# Altium PCB PCB1.PcbDoc
Units mm, origin at the board's own origin, x right, y up, seen from the top; angles counter-clockwise.
Board outline 100 x 100 mm, 4 copper layers (Top Layer, Internal Plane 1, Internal Plane 2, Bottom Layer), stack 0.462 mm thick; 27 components, 17 nets, 92 pads, 2 vias.
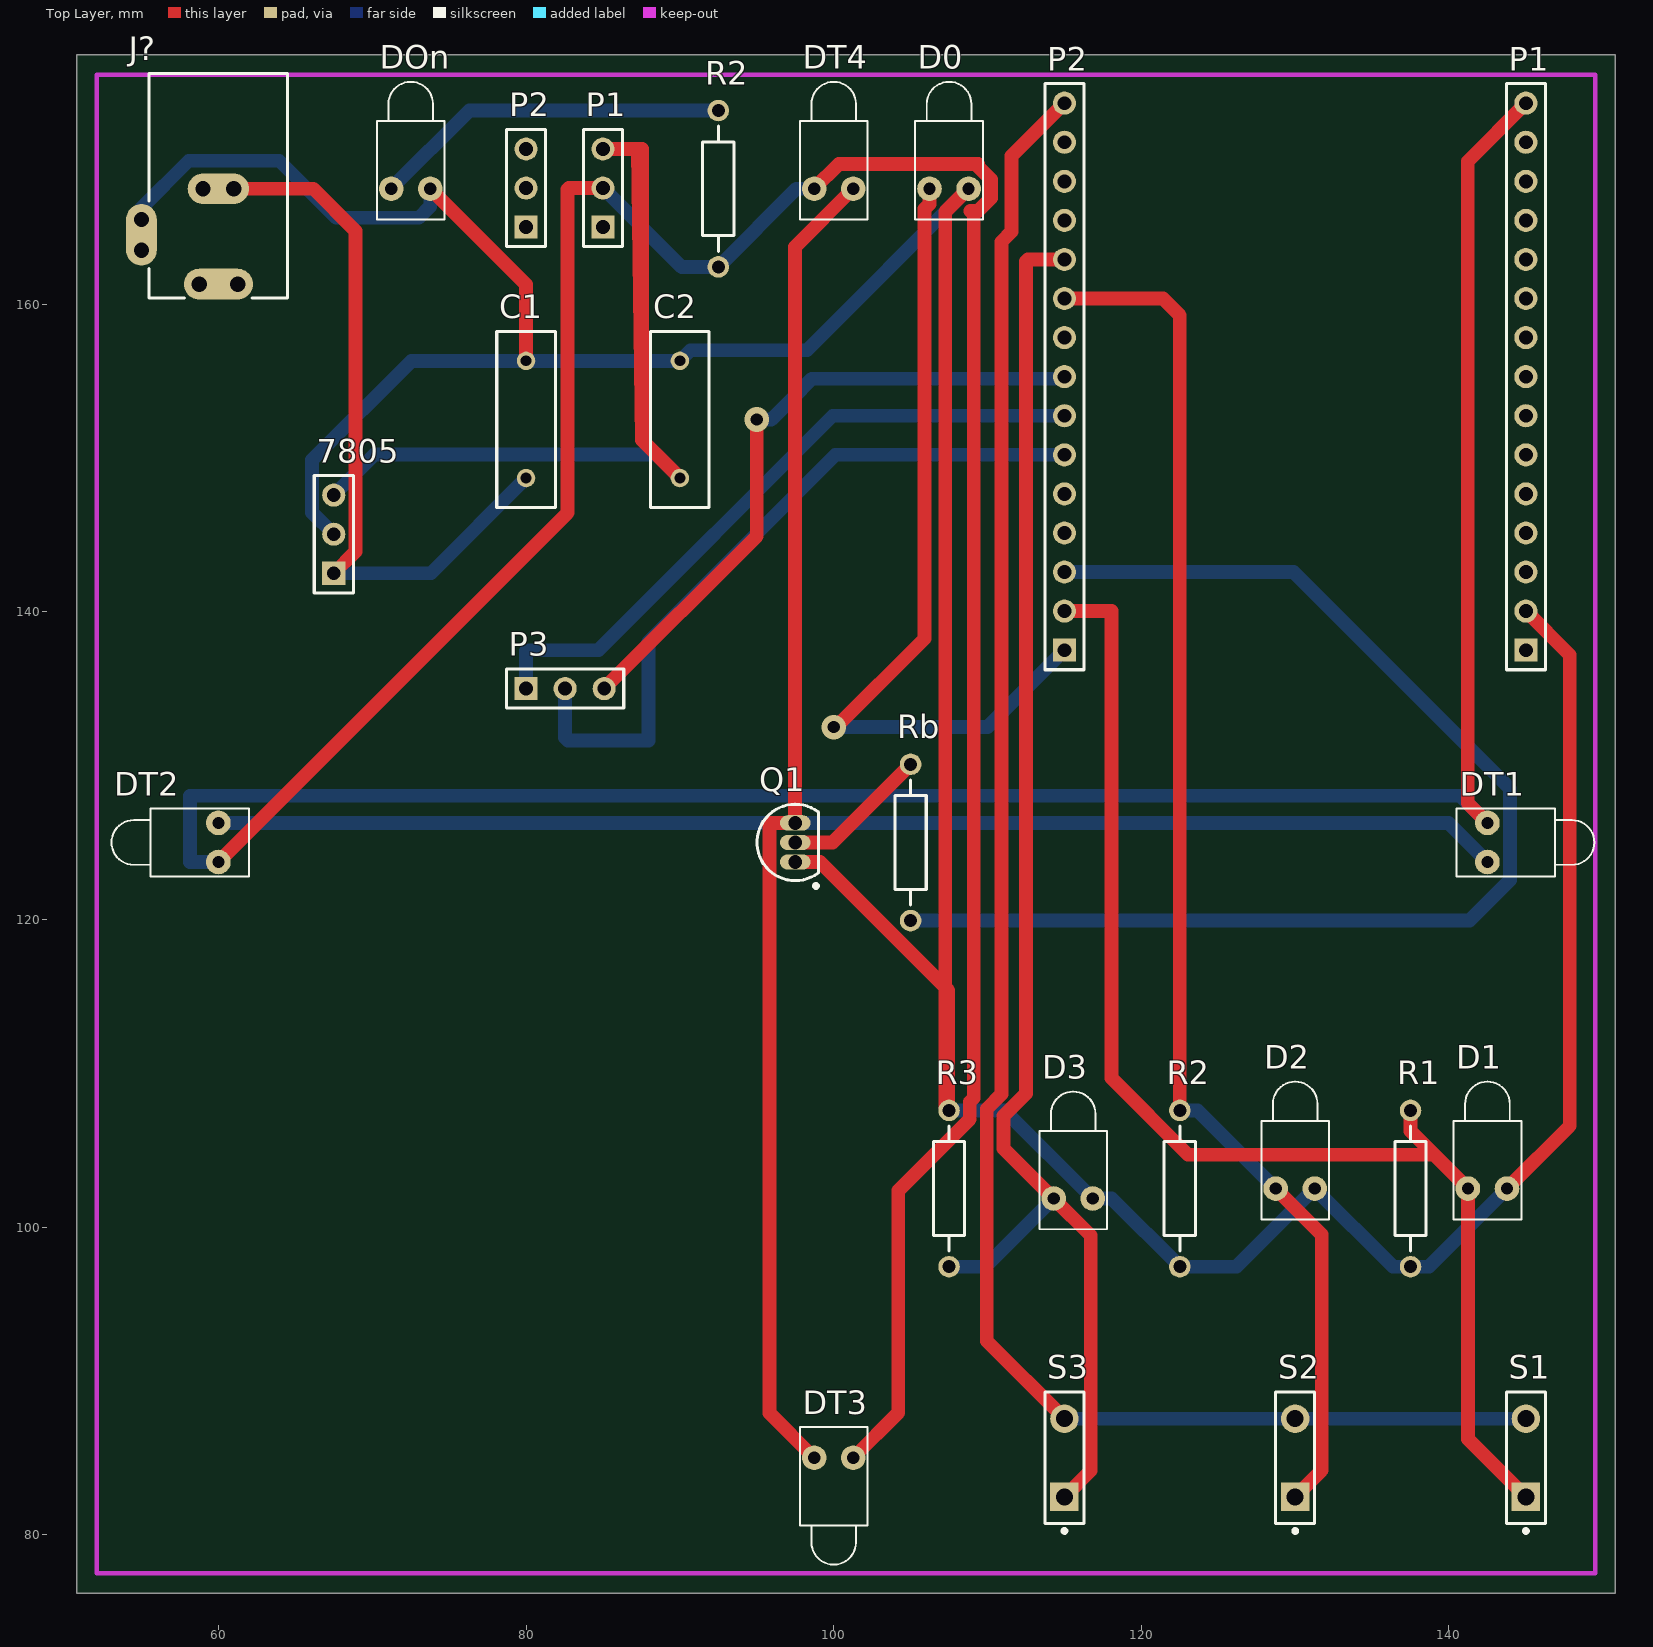
[diagram p0: Top Layer view]
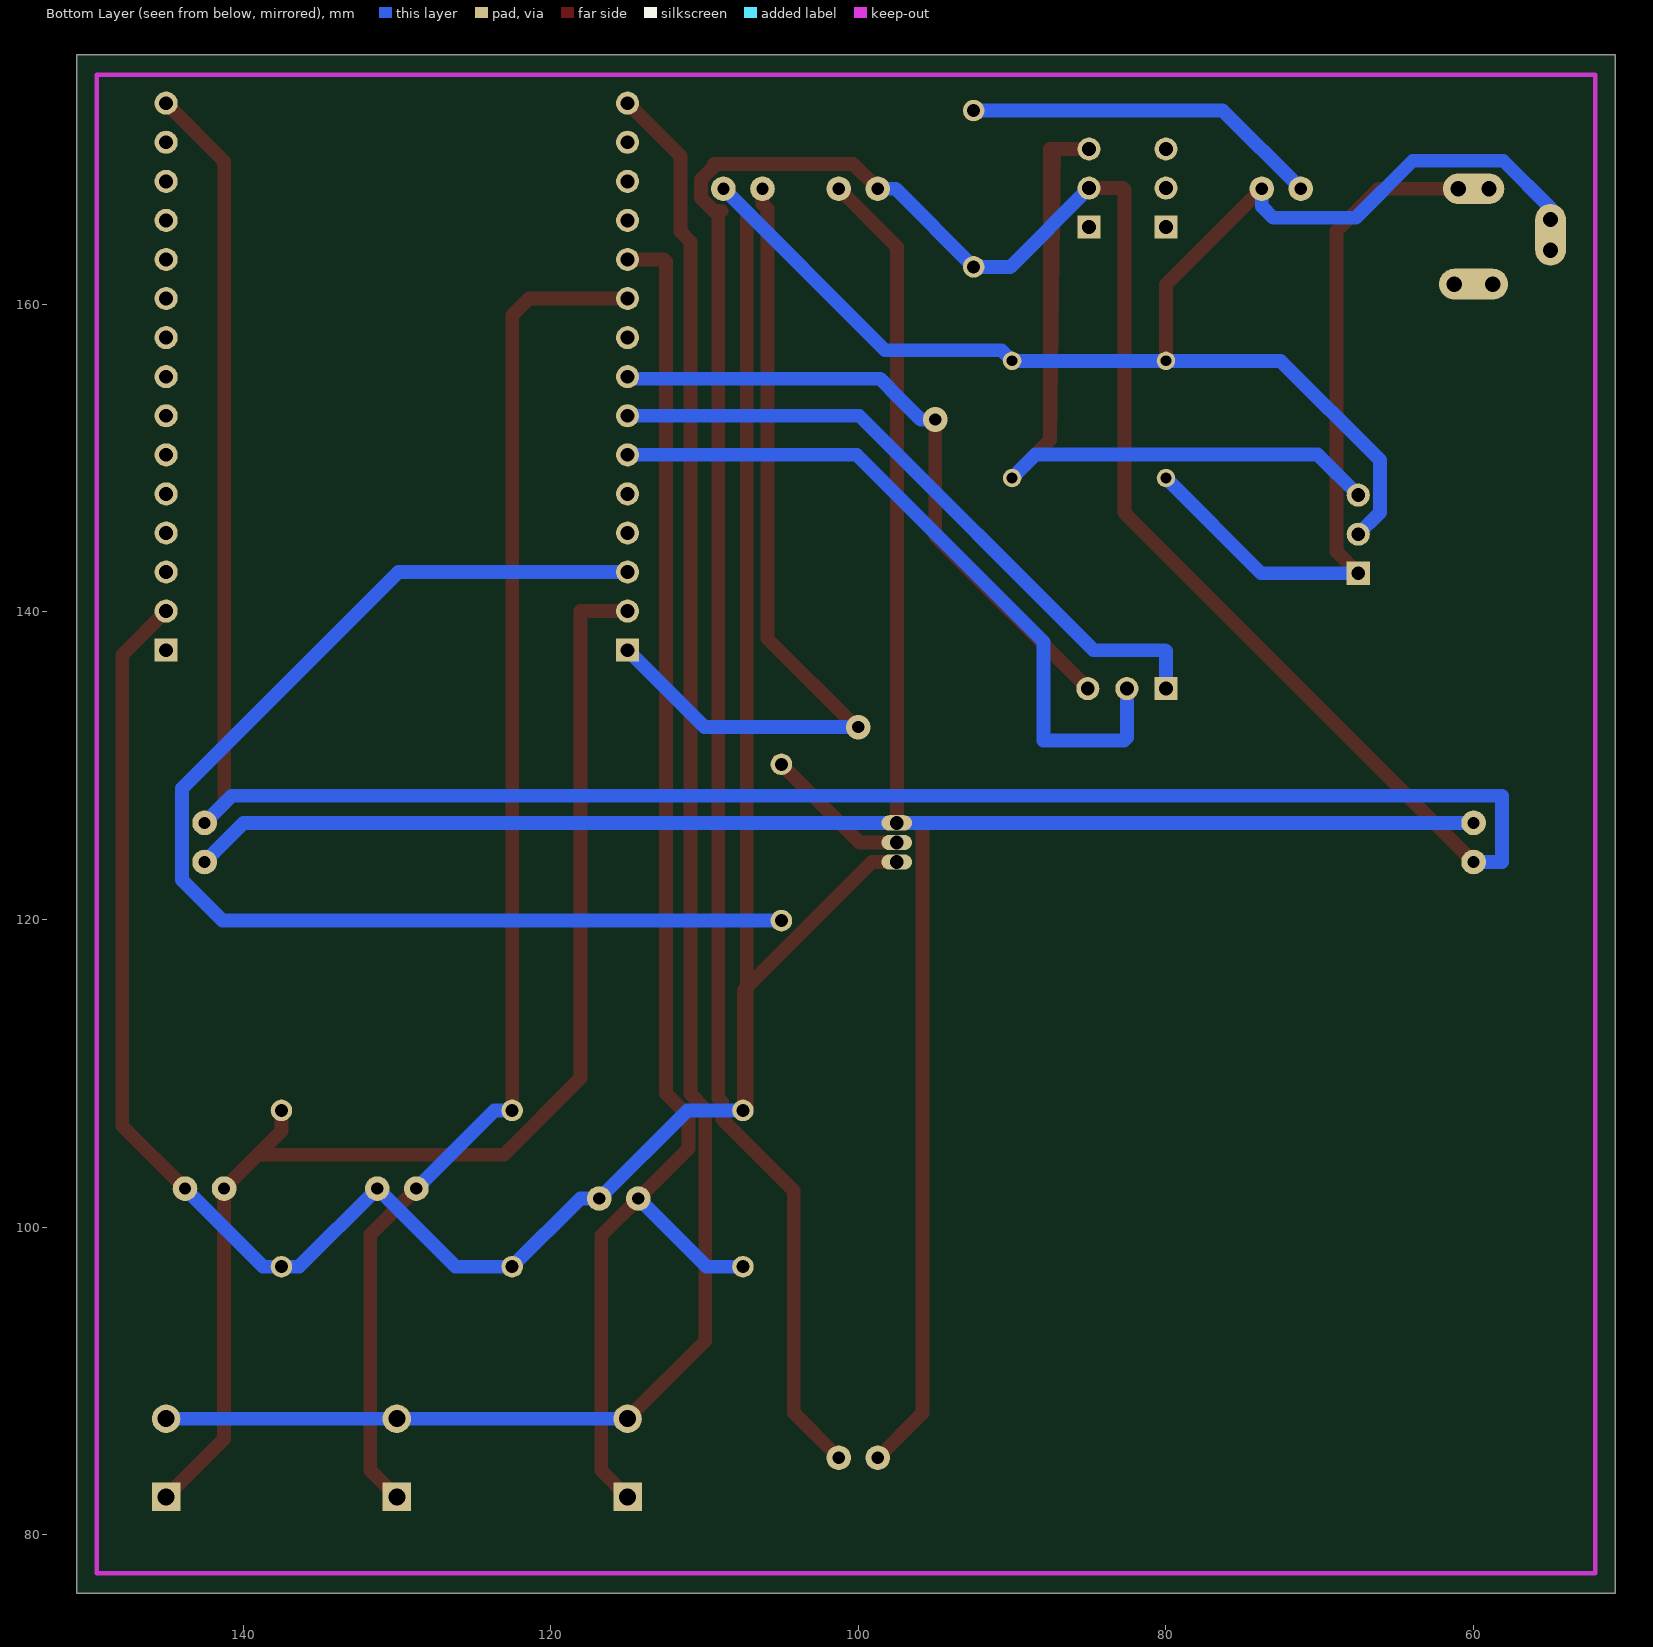
[diagram p1: Bottom Layer view, seen from below]
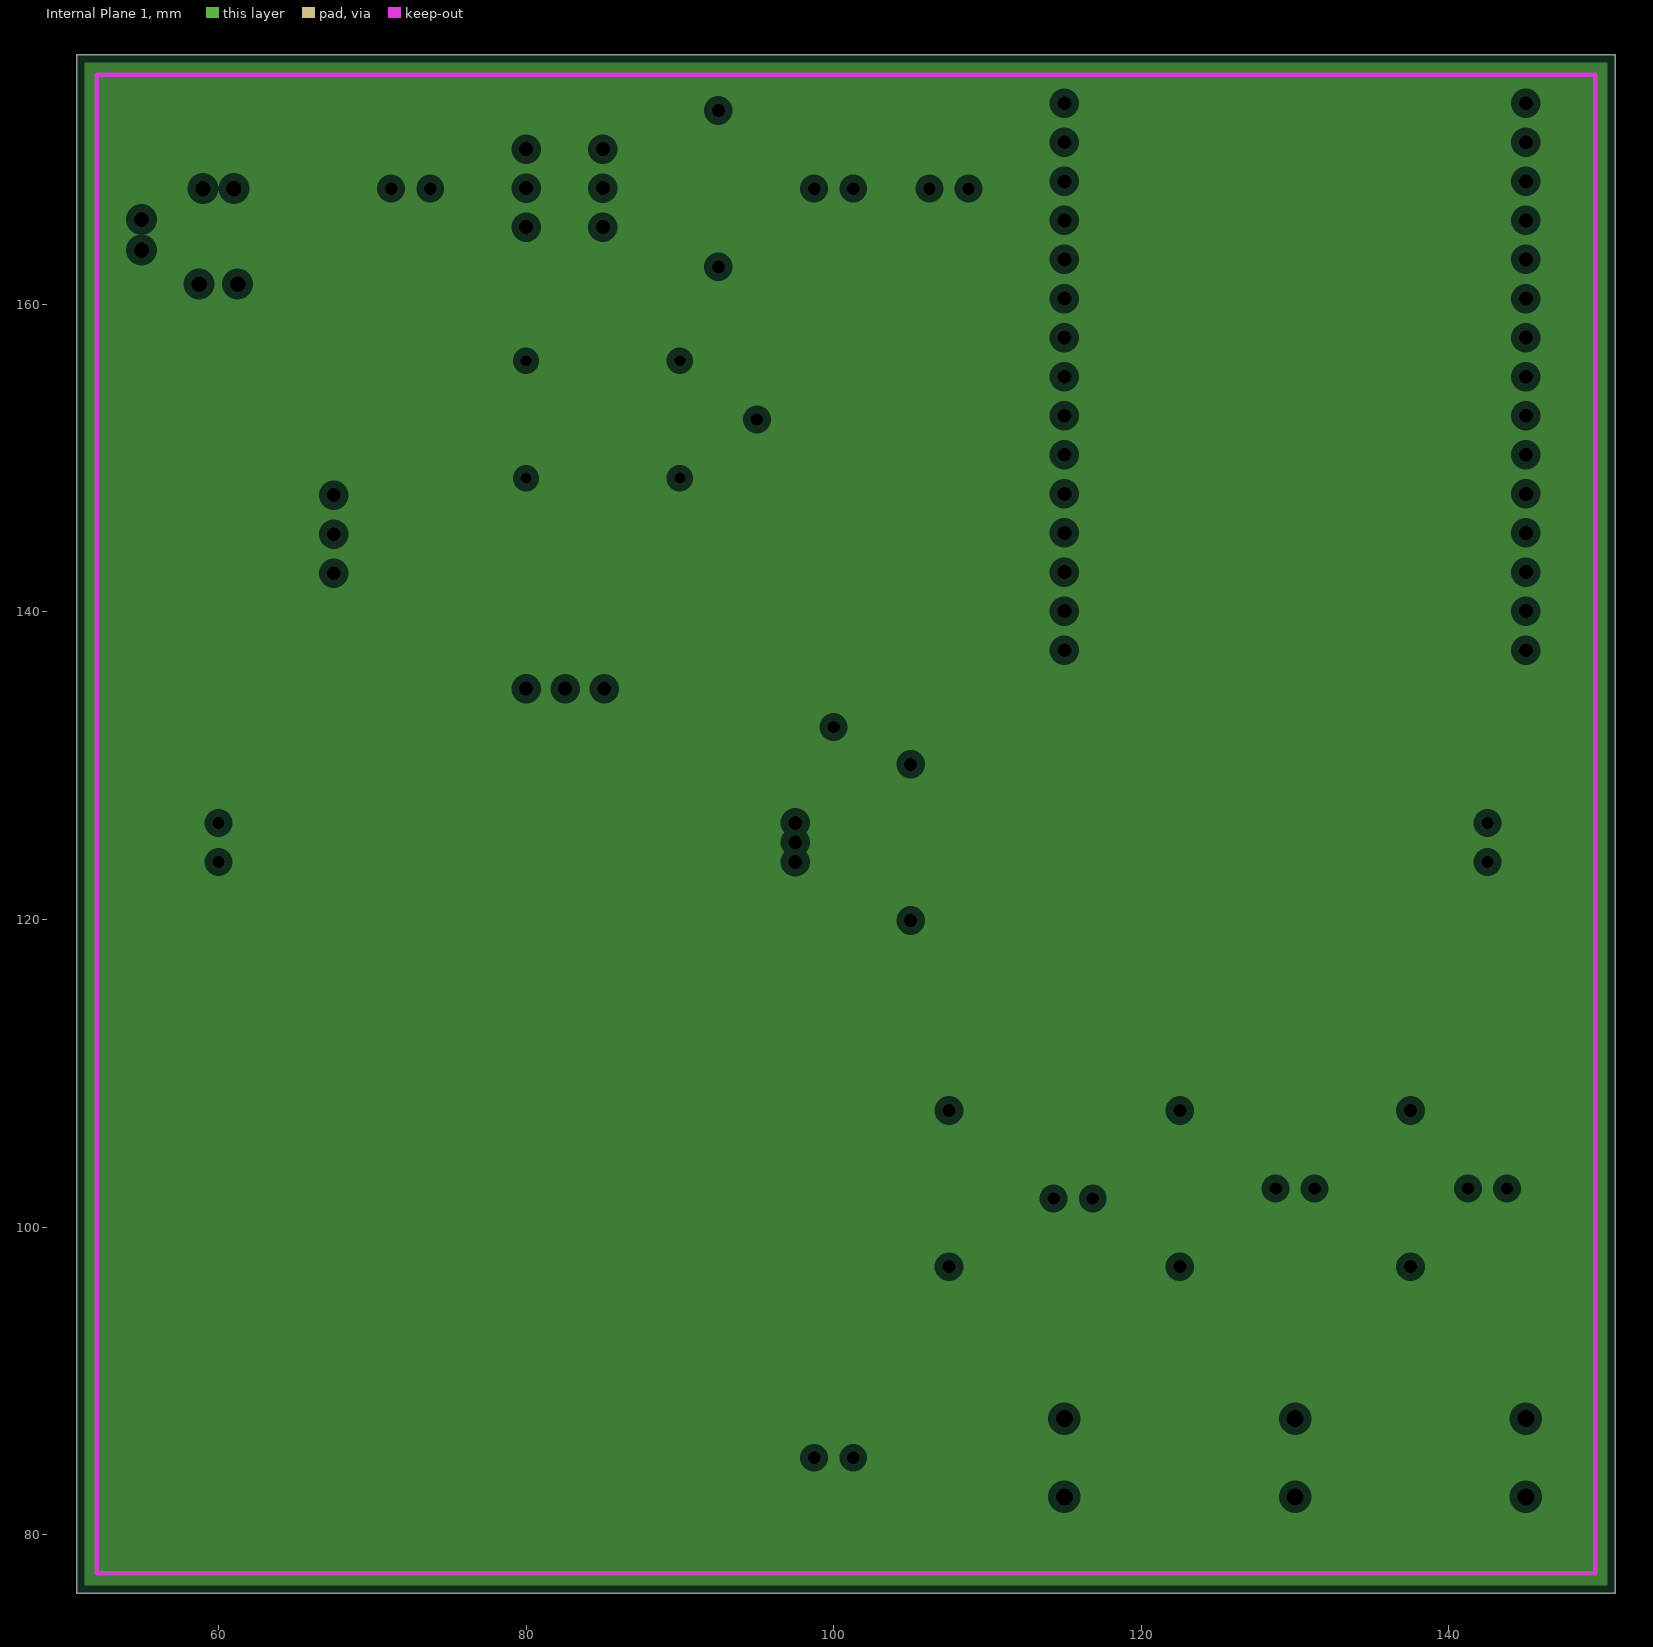
[diagram p2: Internal Plane 1, clearances drawn from the general rule]
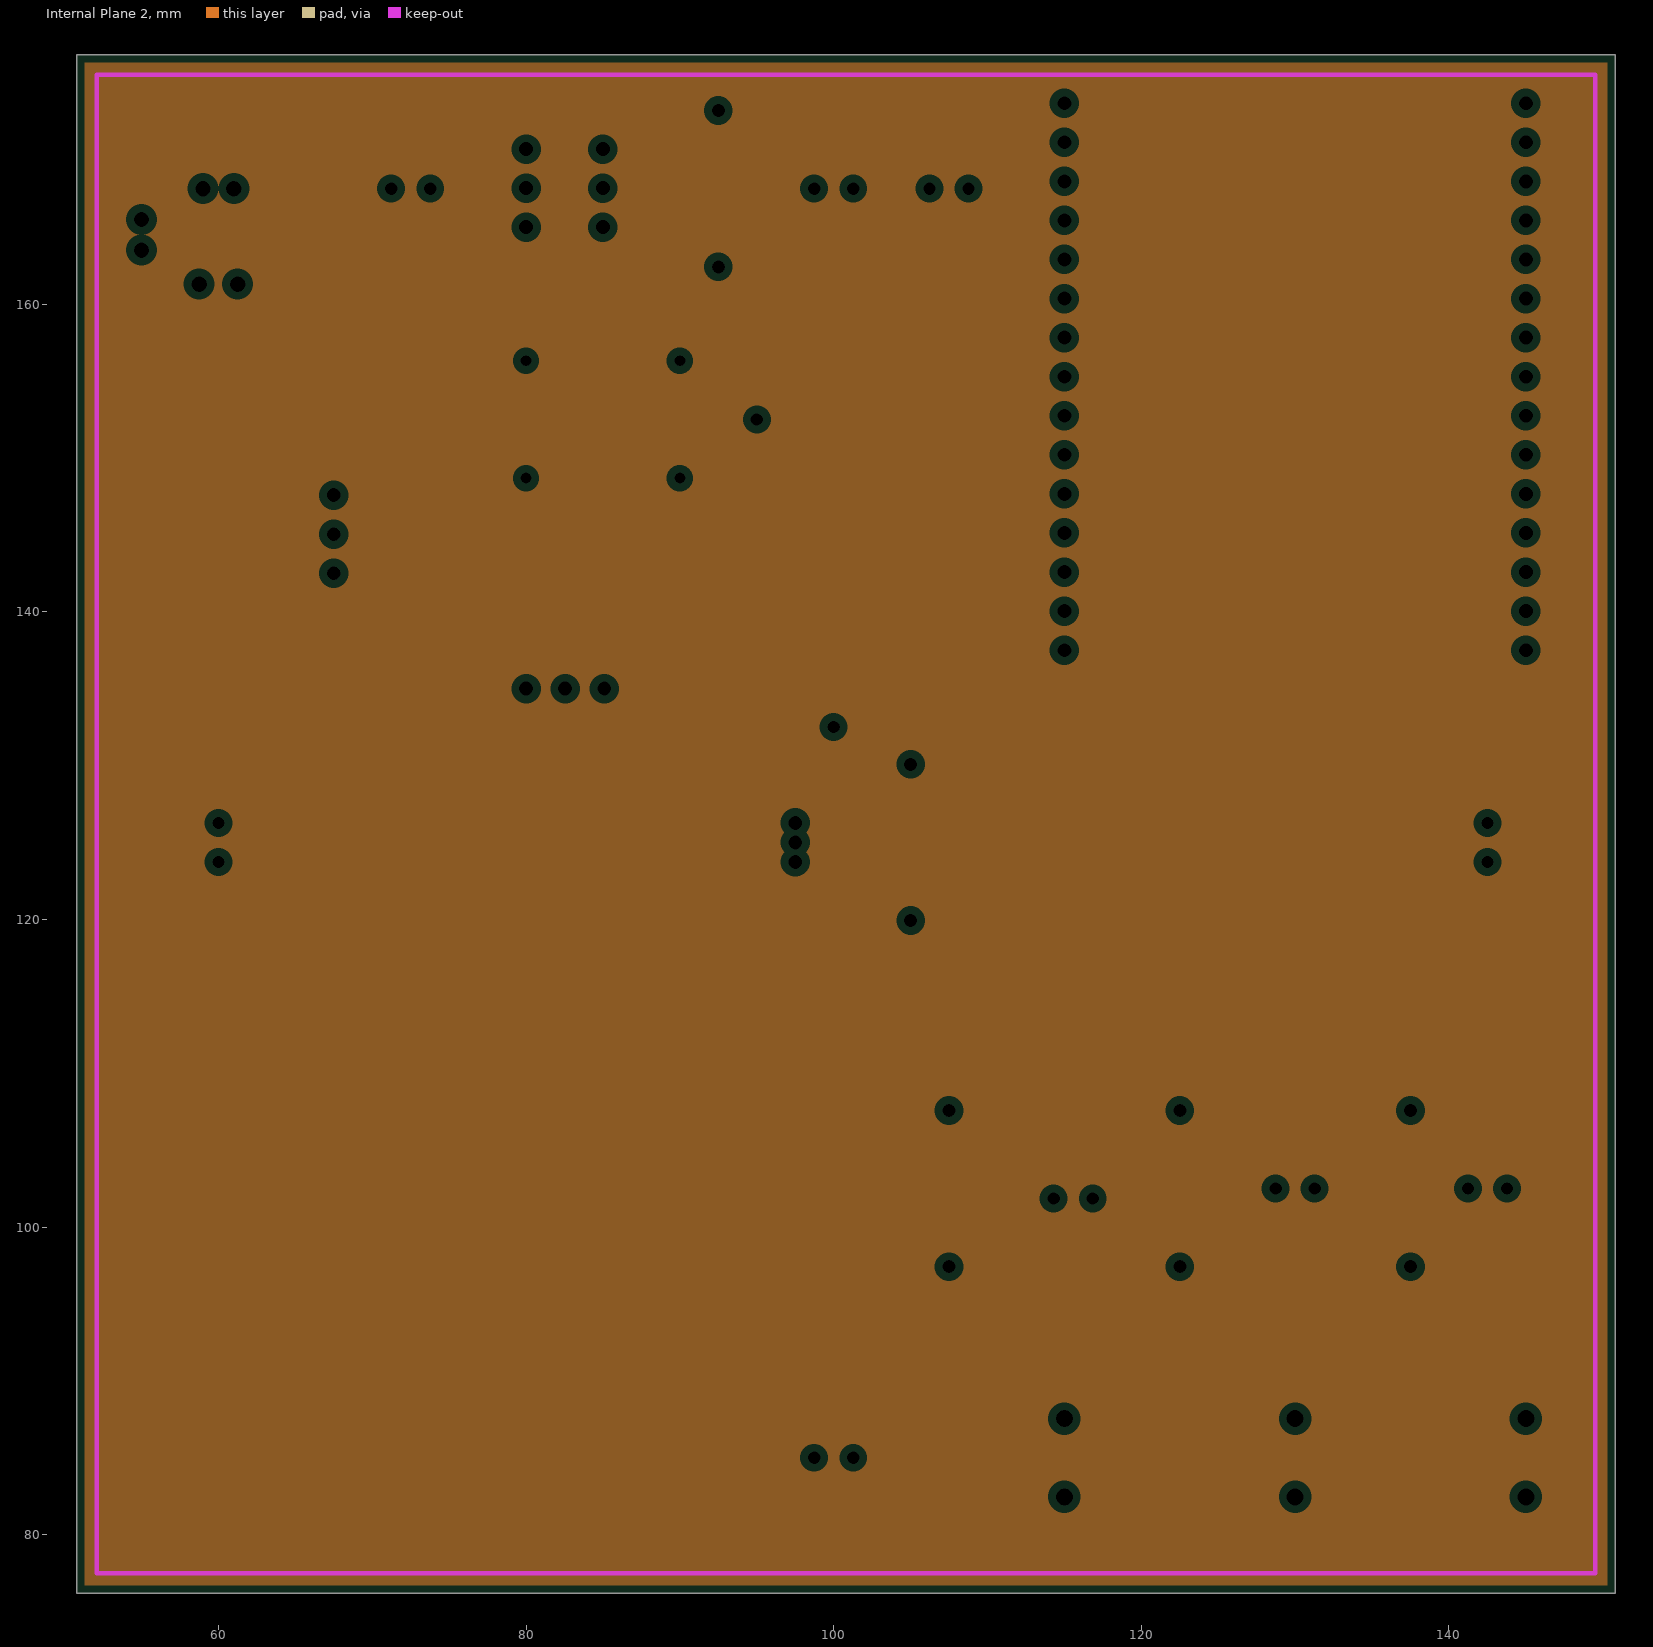
[diagram p3: Internal Plane 2, clearances drawn from the general rule]

## Layer stack, top to bottom
Top Solder: solder mask 0.0102, Solder Resist, Dk 3.5
Top Layer: signal copper 0.0356
Internal Plane 1: plane copper 0.0356
Internal Plane 2: plane copper 0.0356
Dielectric 1: dielectric 0.32, FR-4, Dk 4.8
Bottom Layer: signal copper 0.0356
Bottom Solder: solder mask 0.0102, Solder Resist, Dk 3.5

## Board outline
50.8,76.2 150.8,76.2 150.8,176.2 50.8,176.2

## Design rules (kind name [scope] priority, off if disabled: settings)
Clearance [All] p1: gap=0.2
PlaneClearance [All] p1: clearance=0.508
PlaneConnect [All] p1: planeconnectstyle=Relief reliefexpansion=0.508 reliefentries=4 reliefconductorwidth=0.254 reliefairgap=0.254
PolygonConnect [All] p1: connectstyle=Relief reliefconductorwidth=0.254 reliefentries=4 polygonreliefangle="90 Angle" airgapwidth=0.254
RoomDefinition Sheet1 [InComponentClass('Sheet1')] p1: confinementstyle=ConfineIn formatcopy=TRUE lockcomponents=FALSE outline 162.5,62.5 20,62.5 20,181.102 162.5,181.102
RoutingVias [All] p1: holewidth=0.8 width=1.6 viastyle="Through Hole" minholewidth=0.711 minwidth=1.27 maxholewidth=0.711 maxwidth=1.27
SolderMaskExpansion [All] p1: expansion=0.102
Width [All] p1: maxlimit=1 minlimit=0.8 preferedwidth=0.9
28 further rules are at their usual default settings.

## Classes and differential pairs
component class Sheet1: 7805 C1 C2 D0 D1 D2 D3 DOn DT1 DT2 DT3 DT4 J? P1 P2 P3 Q1 R1 R2 R3 Rb S1 S2 S3

## Components (designator, comment, footprint, x,y, rotation, side; value= is the part's Value field where it differs from the comment)
7805 "7805" HDR1X3 67.5,142.5 r90 top
C1 "Cap" RAD-0.3 80,152.5 r90 top
C2 "Cap" RAD-0.3 90,152.5 r90 top
D0 "LED1" LED-1 107.5,167.5 r90 top
D1 "LED1" LED-1 142.5,102.5 r90 top
D2 "LED1" LED-1 130,102.5 r90 top
D3 "LED1" LED-1 115.57,101.854 r90 top
DOn "LED1" LED-1 72.5,167.5 r90 top
DT1 "LED1" LED-1 142.5,125 r0 top
DT2 "LED1" LED-1 60,125 r180 top
DT3 "LED1" LED-1 100,85 r270 top
DT4 "LED1" LED-1 100,167.5 r90 top
J? "PWR2.5" KLD-0202 60,175 r270 top
P1 "Header 15" HDR1X15 145,137.5 r90 top
P1 "uf" HDR1X3 85,165 r90 top
P2 "Header 15" HDR1X15 115,137.5 r90 top
P2 "ul" HDR1X3 80,165 r90 top
P3 "IrRECV" HDR1X3 80,135 r0 top
Q1 "2N3904" TO-92A 97.5,125 r0 top
R1 "Res2" AXIAL-0.4 137.5,102.5 r90 top
R2 "Res2" AXIAL-0.4 122.5,102.5 r90 top
R2 "Res2" AXIAL-0.4 92.5,167.5 r90 top
R3 "Res2" AXIAL-0.4 107.5,102.5 r90 top
Rb "Res2" AXIAL-0.4 105,125 r90 top
S1 "SW-PB" SPST-2 145,85 r90 top
S2 "SW-PB" SPST-2 130,85 r90 top
S3 "SW-PB" SPST-2 115,85 r90 top

## Footprints (in the part's own frame and the unit in brackets; to place one, negate y for a bottom-side part, rotate by r counter-clockwise, add the part's x,y. Pads: shape width x height; smd on the part's side, far side on the other; paste and mask are expansions set on the pad)
AXIAL-0.4 [mm] "Axial Device, Thru-Hole; 2 Leads; 0.4 in Pin Spacing"
  round 1.4 hole 0.85: 1(-5.08,0) 2(5.08,0)
  silkscreen extent -4.06,-1.02 4.06,1.02
HDR1X3 [mm] "Connector; Header; 3 Position"
  rect 1.5x1.5 hole 0.9: 1(0,0)
  round 1.5 hole 0.9: 2(2.54,0) 3(5.08,0)
  silkscreen extent -1.27,-1.27 6.35,1.27
HDR1X15 [mm] "Connector; Header; 15 Position"
  rect 1.5x1.5 hole 0.9: 1(0,0)
  round 1.5 hole 0.9: 2(2.54,0) 3(5.08,0) 4(7.62,0) 5(10.16,0) 6(12.7,0) 7(15.24,0) 8(17.78,0) 9(20.32,0) 10(22.86,0) 11(25.4,0) 12(27.94,0) 13(30.48,0) 14(33.02,0) 15(35.56,0)
  silkscreen extent -1.27,-1.27 36.83,1.27
KLD-0202 [mm] "DC Power Jack, 2.5mm, KLD Series, PCB Mount"
  oval 2x4.5 all layers, no hole: 1(13.7,0)
  round 1.5 hole 1: 1A(13.7,-1.25) 1B(13.7,1.25) 2A(7.5,-1) 2B(7.5,1) 3A(9.5,-5) 3B(11.5,-5)
  oval 2x4 all layers, no hole: 2(7.5,0)
  oval 4x2 all layers, no hole: 3(10.5,-5)
  silkscreen extent 0,-4.5 14.6,4.5
LED-1 [mm] "LED; 2 Leads"
  round 1.6 hole 0.8: 1(0,1.27) 2(0,-1.27)
  silkscreen extent -2,-2.2 6.95,2.2
RAD-0.3 [mm] "Radial Cap, Thru-Hole; 2 Leads; 0.3 in Pin Spacing"
  round 1.2 hole 0.7: 1(-3.81,0) 2(3.81,0)
  silkscreen extent -5.72,-1.91 5.71,1.9
SPST-2 [mm] "Switch; 2 Leads"
  rect 1.85x1.85 hole 1.1: 1(-2.54,0)
  round 1.85 hole 1.1: 2(2.54,0)
  silkscreen extent -4.89,-1.27 4.28,1.27
TO-92A [mm] "TO, Flat Index; 3 In-Line, Axial Leads; Body Dia. 4.5mm; Leads 0.51 x 0.48 mm (max)"
  oval 2x1 hole 0.9: 1(0,-1.27) 2(0,0) 3(0,1.27)
  silkscreen extent -2.48,-2.95 1.5,2.48, body extent -2.5,-2.5 1.5,2.5, height 6.86

## Part data
7805 P1 P2 P3: library part "Header 3", "Header, 3-Pin"
C1 C2: "Capacitor"
D0 D1 D2 D3 DOn DT1 DT2 DT3 DT4: "Typical RED GaAs LED"
J?: "Low Voltage Power Supply Connector"
P1 P2: "Header, 15-Pin"
Q1: "NPN General Purpose Amplifier"
R1 R2 R2 R3 Rb: "Resistor"
S1 S2 S3: "Switch"

## Via types
v1: diameter 1.6, hole 0.8, Top Layer to Bottom Layer, 2 vias

## Nets (pads, with @x,y where several pads share a name; then routed paths per layer and width w, separated by ;. In a path a pad name is that pad's centre, name@x,y a point inside that pad or via, vN(x,y) a via of type N, cw(c..) or ccw(c..) an arc to the next point about the centre after c; other vN are vias at no path point)
GND: 7805.2 C1.2 C2.2 D0.2 D1.2 D2.2 D3.2 DOn.2 J?.3 J?.3A J?.3B P1.2@145,140.04 Q1.1 R1.1 R2.1@122.5,97.42 R3.2 | length 265
  Top Layer w0.9: J?.3B J?.3 J?.3A ; DOn.2 80,161.27 C1.2 ; Q1.1 99.104,123.73 107.45,115.384 R3.2@107.45,107.63 ; R3.2 107.25,107.83 107.25,165.98 D0.2 ; D1.2 147.85,106.58 147.85,137.19 P1.2@145,140.04
  Bottom Layer w0.9: J?.3 J?.3A 55,166.243 58.073,169.316 63.957,169.316 67.666,165.608 73.025,165.608 73.77,166.353 DOn.2 ; 7805.2 66.091,146.449 66.091,149.86 72.541,156.31 C1.2 84.988,156.31 C2.2 90.687,156.997 98.267,156.997 D0.2 ; R3.2 111.114,107.58 D3.2 118.066,101.854 122.5,97.42 126.19,97.42 D2.2 136.35,97.42 R1.1 138.69,97.42 D1.2
Net7805_1: 7805.1 C1.1 J?.2 J?.2A J?.2B | length 50
  Top Layer w0.9: J?.2 J?.2B 66.167,167.5 68.91,164.757 68.91,143.91 7805.1
  Bottom Layer w0.9: J?.2A J?.2 J?.2B ; 7805.1 73.81,142.5 C1.1
Net7805_3: 7805.3 C2.1 P1.3@85,170.08 | length 68.1
  Top Layer w0.9: P1.3@85,170.08 87.262,170.08 ; C2.1 87.528,151.162 ; 87.262,170.08 87.528,170.08 87.528,151.162 ; 87.262,170.08 87.528,151.162
  Bottom Layer w0.9: 7805.3 70.136,150.216 88.474,150.216 C2.1
NetD0_1: D0.1 P2.1@115,137.5 | length 54.7
  Top Layer w0.9: v1(100,132.5) 100.155,132.5 105.9,138.245 105.9,166.186 106.23,166.516 D0.1
  Bottom Layer w0.9: v1(100,132.5) 110,132.5 P2.1@115,137.5
NetD1_1: D1.1 P2.2@115,140.04 R1.2 S1.1 | length 84.7
  Top Layer w0.9: P2.2@115,140.04 118.059,140.04 118.059,109.677 123.036,104.7 139.03,104.7 ; R1.2 137.5,106.23 D1.1 141.23,86.23 S1.1
NetD2_1: D2.1 P2.10 R2.2@122.5,107.58 S2.1 | length 90
  Top Layer w0.9: P2.10 121.4,160.36 122.5,159.26 R2.2@122.5,107.58 ; D2.1 131.724,99.506 131.724,84.184 S2.1
  Bottom Layer w0.9: R2.2@122.5,107.58 123.65,107.58 D2.1
NetD3_1: D3.1 P2.11 R3.1 S3.1 | length 95.2
  Top Layer w0.9: S3.1 116.713,84.173 116.713,99.441 D3.1 111.05,105.104 111.05,107.228 112.5,108.678 112.5,162.775 112.625,162.9 P2.11
  Bottom Layer w0.9: R3.1 109.866,97.42 D3.1
NetDOn_1: DOn.1 R2.2@92.5,172.58 | length 23.4
  Bottom Layer w0.9: DOn.1 76.31,172.58 R2.2@92.5,172.58
NetDT1_1: DT1.1 DT2.1 DT3.1 DT4.1 P1.2@85,167.54 P1.15 R2.1@92.5,162.42 | length 313.5
  Top Layer w0.9: DT2.1 82.7,146.43 82.7,167.45 82.79,167.54 P1.2@85,167.54 ; DT4.1 100.343,169.113 109.398,169.113 109.371,169.086 109.371,168.95 110.22,168.101 110.22,166.899 109.371,166.05 108.876,166.05 109.1,165.826 109.1,108.389 108.85,108.139 108.85,107.021 104.2,102.371 104.2,87.93 DT3.1 ; DT1.1 141.225,127.545 141.225,169.285 P1.15
  Bottom Layer w0.9: DT2.1 58.15,123.73 58.15,128.041 140.729,128.041 DT1.1 ; P1.2@85,167.54 90.12,162.42 92.5,162.42 97.58,167.5 DT4.1
NetDT1_2: DT1.2 DT2.2 DT3.2 DT4.2 Q1.3 | length 170.5
  Top Layer w0.9: Q1.3 Q1.3@97.485,126.27 ; DT3.2 95.834,87.896 95.834,126.27 Q1.3@97.485,126.27 ; DT4.2 97.485,163.715 Q1.3@97.485,126.27
  Bottom Layer w0.9: DT2.2 Q1.3 139.96,126.27 DT1.2
NetJ?_1: J?.1 J?.1A J?.1B | length 2.5
  Bottom Layer w0.9: J?.1A J?.1 J?.1B
NetP2_3: P2.3@115,142.58 Rb.1 | length 80.8
  Bottom Layer w0.9: Rb.1 141.332,119.92 143.967,122.555 143.967,128.499 129.886,142.58 P2.3@115,142.58
NetP2_6: P2.6 P3.2 | length 47.2
  Bottom Layer w0.9: P3.2 82.54,131.81 82.725,131.625 87.95,131.625 87.95,138.05 100.1,150.2 P2.6
NetP2_7: P2.7 P3.1 | length 43.8
  Bottom Layer w0.9: P3.1 80,137.45 80.05,137.5 84.7,137.5 99.94,152.74 P2.7
NetP2_8: P2.8 P3.3 | length 42.8
  Top Layer w0.9: P3.3 95,144.92 v1(95,152.5)
  Bottom Layer w0.9: v1(95,152.5) 95.944,152.5 97.284,153.84 97.29,153.84 98.6,155.15 114.87,155.15 P2.8
NetP2_15: P2.15 S1.2 S2.2 S3.2 | length 119.7
  Top Layer w0.9: S3.2 109.95,92.59 109.95,107.684 110.9,108.634 110.9,164.05 111.558,164.708 111.558,169.617 P2.15
  Bottom Layer w0.9: S3.2 S2.2 S1.2
NetQ1_2: Q1.2 Rb.2 | length 9.6
  Top Layer w0.9: Q1.2 99.92,125 Rb.2
pads on no net: P1.1 P1.3@145,142.58 P1.4 P1.5 P1.6 P1.7 P1.8 P1.9 P1.10 P1.11 P1.12 P1.13 P1.14 P2.1@80,165 P2.2@80,167.54 P2.3@80,170.08 P2.4 P2.5 P2.9 P2.12 P2.13 P2.14

## Keep-outs
Keep-Out Layer:
  lines w0.3: 52.1,77.5 149.5,77.5 149.5,174.9 52.1,174.9 52.1,77.5

## Silkscreen, mask and mechanical layers (free items; w line width, h text height)
Drill Drawing:
  text ".LEGEND" at 155.88,81.28 h1.52
  text "Drill Drawing." at 155.88,78.74 h1.52

## Dimensions
52.1,77.5 to 52.1,174.9 on Mechanical 1
51.084,75.976 to 148.484,75.976 on Mechanical 1

## Text inside footprints (layer, text, board x,y; h text height)
J?: Mechanical 1 "Alert PCB fab to slot details" at 66.066,174.714 h0.3 r270; Mechanical 1 "Assign keep-out area to slot" at 66.566,174.714 h0.3 r270; Mechanical 1 "Mech 1 - Slot cut-out" at 65.566,174.714 h0.3 r270; Mechanical 1 "Mech 2 - Clearance, move to internal plane if present" at 65.066,174.714 h0.3 r270